# EAGLE board SCHMATIC (EAGLE 9.5.2)
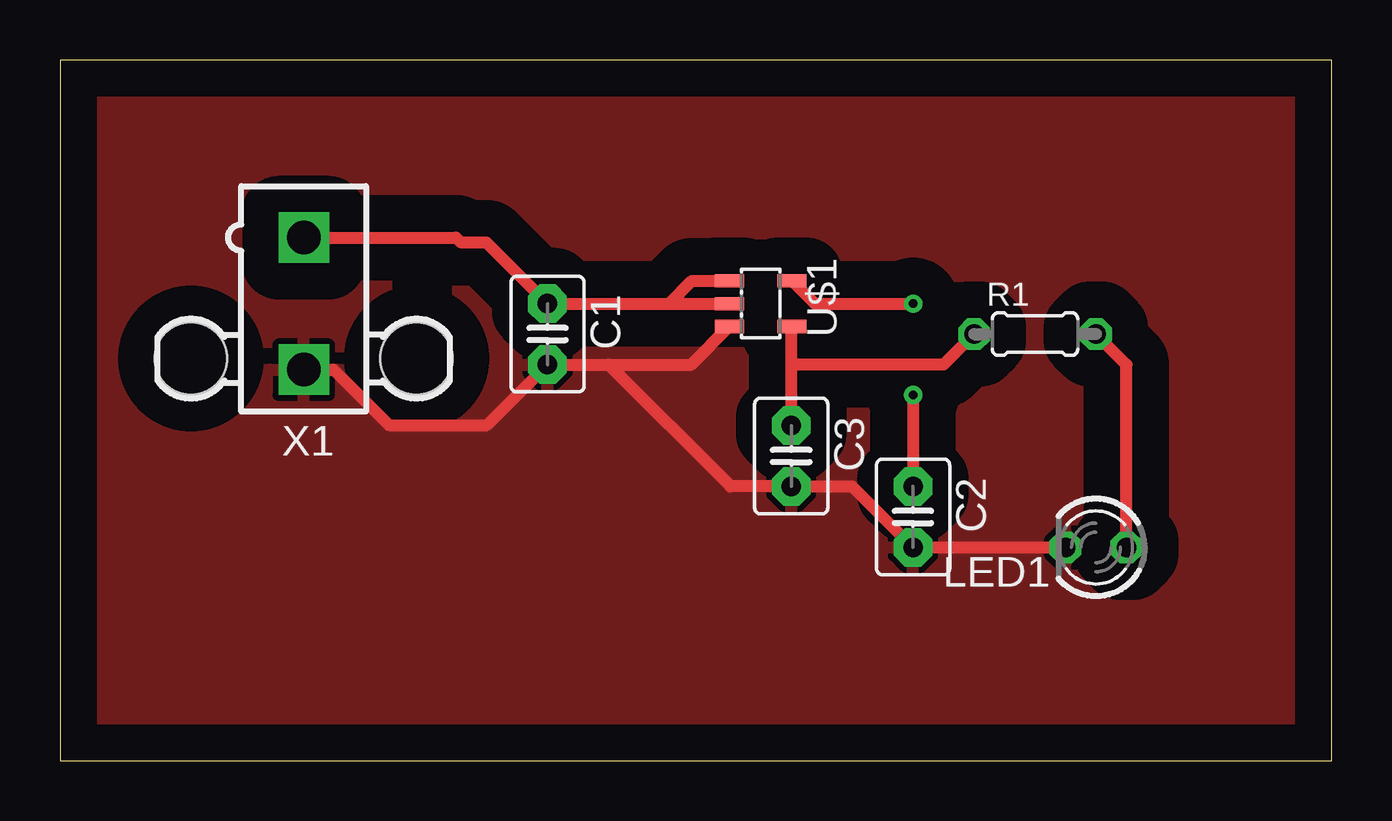
[diagram p0: board, top side]
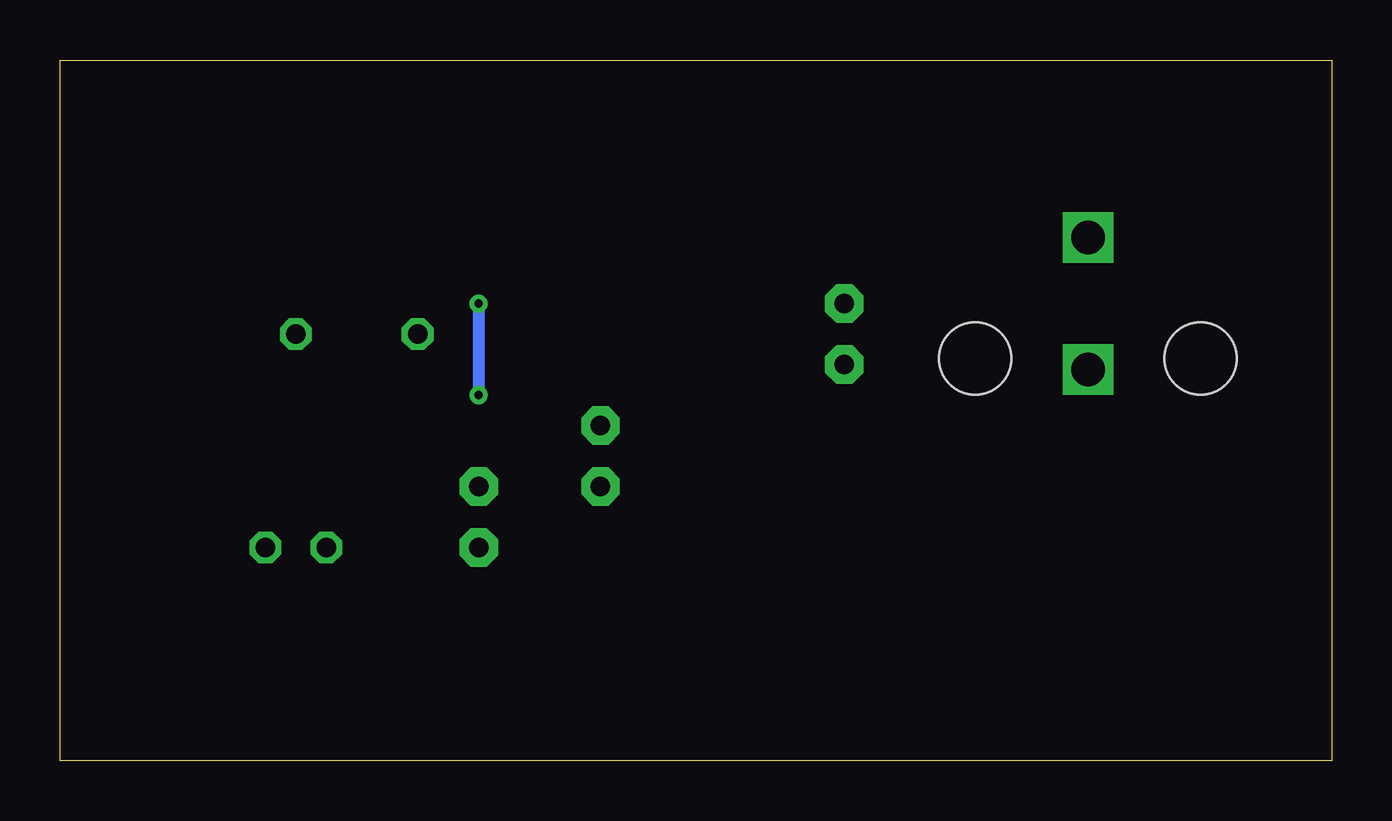
[diagram p1: board, bottom side, seen from below]

Size 53.01 x 29.2 mm. Coordinates in mm from the lower left corner, seen from the top.
Outline: 0,0 53.01,0 53.01,29.2 0,29.2 0,0
Copper layers (1*16): Top 0.035mm / dielectric 1.5mm / Bottom 0.035mm
Design rules "default": minimum track width 6mil, minimum drill 0.35mm, track to track 6mil, track to pad 6mil, pad to pad 6mil, via to via 6mil, smd to smd 6mil, copper to edge 40mil, drill to drill 6mil, minimum pad ring 10mil, minimum via ring 8mil, stop-mask expansion 4mil, vias tented up to drill 0mil, thermal gap 10mil

## Footprints (pad centres in the part's own frame; a part is rotated, then mirrored left to right if it is on the bottom)
C2.5-3 = drill 0.813 pad 1.6 octagon: 1 -1.27,0; 2 1.27,0
LED3MM = drill 0.813 octagon: A -1.27,0; K 1.27,0
0204/5 = drill 0.813 octagon: 1 -2.54,0; 2 2.54,0
SOT23-5L = smd 0.55 x 1.2: 1 -0.95,-1.3; 2 0,-1.3; 3 0.95,-1.3; 4 0.95,1.3; 5 -0.95,1.3
5566-2 = drill 1.4 square: 1 0,-2.75; 2 0,2.75 | hole 3: 4.7,2.29; -4.7,2.29

## Placement (x,y rotation side)
C1  [C2.5-3]  20.32,17.78 270 top
C2  [C2.5-3]  35.56,10.16 270 top
C3  2.2uF  [C2.5-3]  30.48,12.7 270 top
LED1  [LED3MM]  43.18,8.89 180 top
R1  100  [0204/5]  40.64,17.78 0 top
U$1  TPS799_1  [SOT23-5L]  29.21,19.05 270 top
X1  5566-2  [5566-2]  10.16,19.05 180 top

## Library data of the parts
C1-C3 = capacitor-wima
LED1 = led
R1 = rcl; SPICEPREFIX: R
U$1 = Voltage_Regulator
X1 = con-molex; MF: MOLEX; OC_FARNELL: 1822072; OC_NEWARK: unknown

## Nets
GND: C1.2 C2.2 C3.2 LED1.K U$1.3 X1.2
N$4: LED1.A R1.2
NR: C2.1 U$1.5
VIN_5V: C1.1 U$1.1 U$1.2 X1.1
VOUT: C3.1 R1.1 U$1.4

## Tracks (layer width: path | path; a pad name or v marks a point on that pad's centre or on a via)
GND
  Top 0.508: 22.86,16.51 C1.2 17.8,13.99 13.71,13.99 11.4,16.3 X1.2 | 22.86,16.51 26.32,16.51 U$1.3 | 22.86,16.51 27.94,11.43 C3.2 33.02,11.43 C2.2 LED1.K
  pour Top (isolate 1.524): 0,0 53.34,0 53.34,29.21 0,29.21
N$4
  Top 0.508: LED1.A 44.45,16.51 R1.2
NR  (via drill 0.35)
  Top 0.508: U$1.5 31.46,19.05 v35.56,19.05 | v35.56,15.24 C2.1
  Bottom 0.508: v35.56,19.05 v35.56,15.24
VIN_5V
  Top 0.508: X1.1 16.51,21.8 16.72,21.59 17.78,21.59 C1.1 25.4,19.05 | 25.4,19.05 U$1.2 | 25.4,19.05 26.35,20 U$1.1
VOUT
  Top 0.508: C3.1 30.48,16.51 | 30.48,16.51 30.48,18.07 U$1.4 | R1.1 36.83,16.51 30.48,16.51